# EAGLE board d2102-spinsemi-fx (EAGLE 7.4.1)
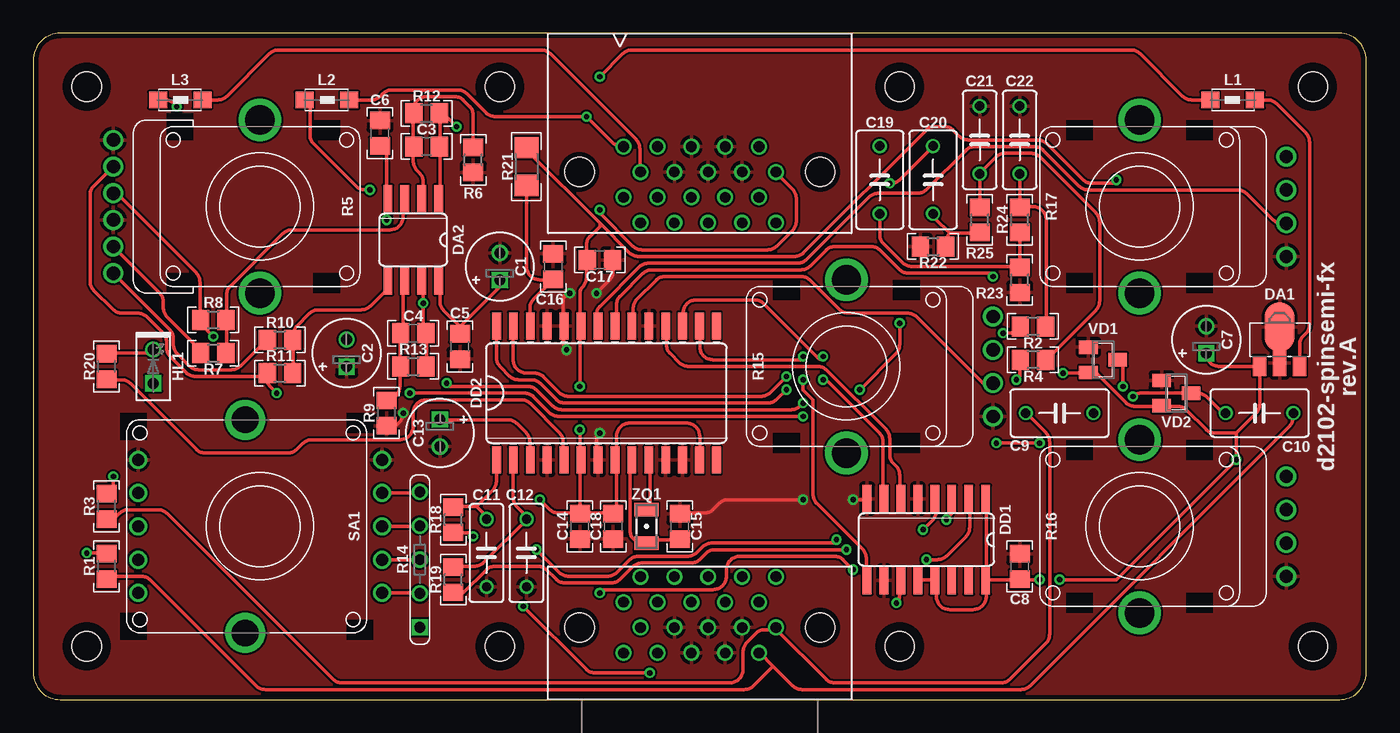
[diagram p0: board, top side]
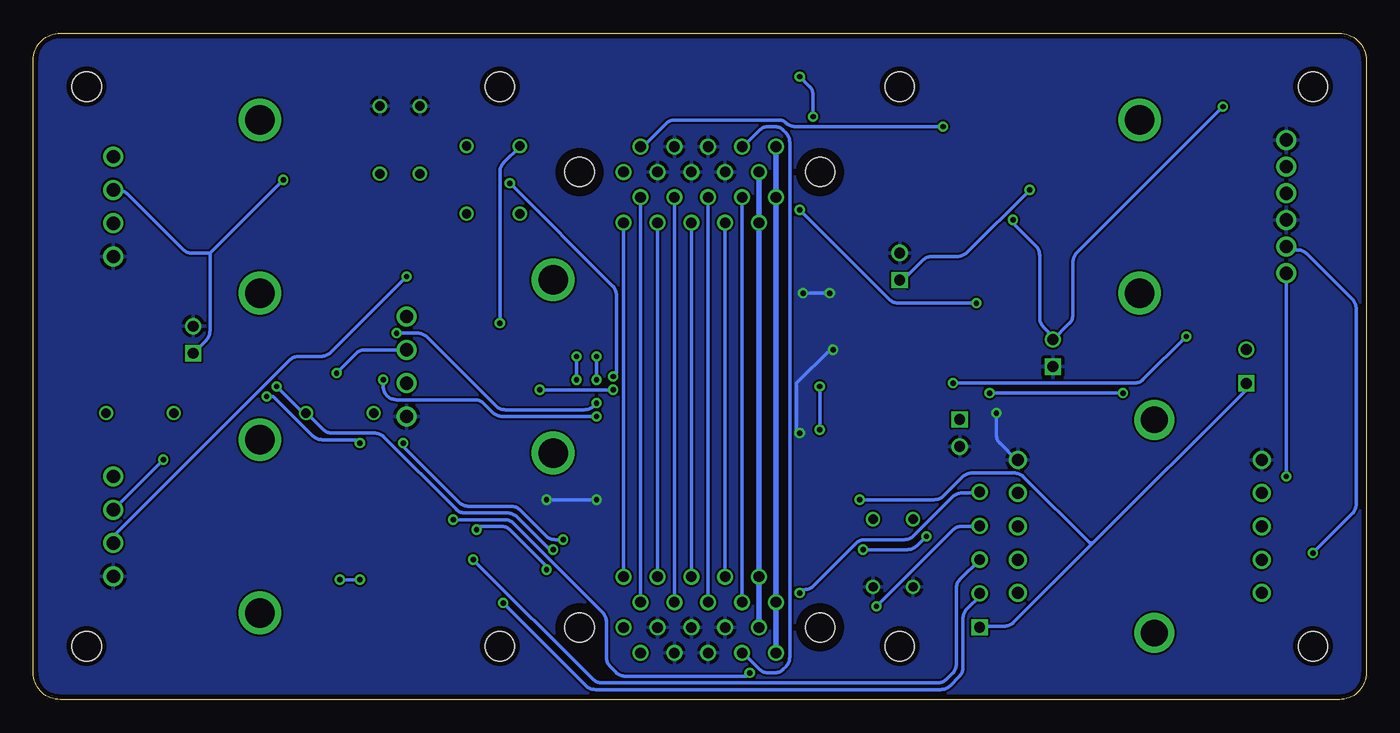
[diagram p1: board, bottom side, seen from below]

Size 100 x 50 mm. Coordinates in mm from the lower left corner, seen from the top.
Outline: 0,48 0,2 arc90 2,0 98,0 arc90 100,2 100,48 arc90 98,50 2,50 arc90 0,48
Copper layers (1*16): Top 0.0356mm / dielectric 1.5011mm / Bottom 0.0356mm
Design rules "sonictrain": minimum track width 6mil, minimum drill 13mil, track to track 6mil, track to pad 6mil, pad to pad 6mil, via to via 6mil, smd to smd 6mil, copper to edge 15mil, drill to drill 6mil, minimum pad ring 7mil, minimum via ring 7mil, stop-mask expansion 3mil, vias tented up to drill 0mil, thermal gap 10mil

## Footprints (pad centres in the part's own frame; a part is rotated, then mirrored left to right if it is on the bottom)
E2-5 = drill 0.813 square: + -1.016,0 | drill 0.813: - 1.016,0
C-0805 = smd 1.3 x 1.5: 1 -0.95,0; 2 0.95,0
C050-035X075 = drill 0.7: 1 -2.54,0; 2 2.54,0
C050-025X075 = drill 0.7: 1 -2.54,0; 2 2.54,0
SOT89 = smd 1 x 1.5: 1 -1.499,-1.981; 3 1.499,-1.981 | smd 1 x 2: 2 0,-1.727 | smd 2.2 x 3.7: 2@1 0,0.94
SO-8 = smd 0.66 x 2.032: 1 -1.905,-3.073; 2 -0.635,-3.073; 3 0.635,-3.073; 4 1.905,-3.073; 5 1.905,3.073; 6 0.635,3.073; 7 -0.635,3.073; 8 -1.905,3.073
SO-16 = smd 0.66 x 2.032: 1 -4.445,-3.073; 2 -3.175,-3.073; 3 -1.905,-3.073; 4 -0.635,-3.073; 5 0.635,-3.073; 6 1.905,-3.073; 7 3.175,-3.073; 8 4.445,-3.073; 9 4.445,3.073; 10 3.175,3.073; 11 1.905,3.073; 12 0.635,3.073; 13 -0.635,3.073; 14 -1.905,3.073; 15 -3.175,3.073; 16 -4.445,3.073
SO28W = smd 0.66 x 2.032: 1 -8.255,-5.029; 2 -6.985,-5.029; 3 -5.715,-5.029; 4 -4.445,-5.029; 5 -3.175,-5.029; 6 -1.905,-5.029; 7 -0.635,-5.029; 8 0.635,-5.029; 9 1.905,-5.029; 10 3.175,-5.029; 11 4.445,-5.029; 12 5.715,-5.029; 13 6.985,-5.029; 14 8.255,-5.029; 15 8.255,5.029; 16 6.985,5.029; 17 5.715,5.029; 18 4.445,5.029; 19 3.175,5.029; 20 1.905,5.029; 21 0.635,5.029; 22 -0.635,5.029; 23 -1.905,5.029; 24 -3.175,5.029; 25 -4.445,5.029; 26 -5.715,5.029; 27 -6.985,5.029; 28 -8.255,5.029
LED2X5 = drill 0.813 square: A -1.27,0 | drill 0.813: K 1.27,0
1206 = smd 1.35 x 1.2: 1 -1.7,0; 2 1.65,0
ST2-BOARD-50 = drill 0.8: A+15 44.285,7.31; A+15' 44.285,37.69; A-15 45.555,9.215; A-15' 45.555,35.785; ACV1 51.905,7.31; ACV1' 51.905,37.69; ACV2 53.175,9.215; ACV2' 53.175,35.785; ALFBK 49.365,7.31; ALFBK' 49.365,37.69; ALMIX 46.825,7.31; ALMIX' 46.825,37.69; ARFBK 50.635,9.215; ARFBK' 50.635,35.785; ARMIX 48.095,9.215; ARMIX' 48.095,35.785; ASMBCLK 55.715,9.215; ASMBCLK' 55.715,35.785; ASMBDAT 54.445,7.31; ASMBDAT' 54.445,37.69; B4 48.095,5.405; B4' 48.095,39.595; B5 49.365,3.5; B5' 49.365,41.5; B6 50.635,5.405; B6' 50.635,39.595; B7 51.905,3.5; B7' 51.905,41.5; B8 53.175,5.405; B8' 53.175,39.595; B+15 44.285,3.5; B+15' 44.285,41.5; B-15 45.555,5.405; B-15' 45.555,39.595; BINL 54.445,3.5; BINR 55.715,5.405; BOUTL' 54.445,41.5; BOUTR' 55.715,39.595; BSENSE 46.825,3.5; BSENSE' 46.825,41.5 | hole 2.2: 4,4; 4,46; 96,4; 96,46; 35,46; 65,46; 65,4; 35,4; 59.025,5.405; 40.975,5.405; 40.975,39.595; 59.025,39.595
R-0805 = smd 1.3 x 1.5: 1 -0.95,0; 2 0.95,0
RV11-DUAL = drill 1: 1 -1,-11; 1' -3,-11; 2 1,-11; 2' -5,-11; 3 3,-11; 3' 5,-11 | drill 2.2: S1 -6.5,0; S2 6.5,0
R-SIL5 = drill 0.813 square: 1 -5.08,0 | drill 0.813: 2 -2.54,0; 3 0,0; 4 2.54,0; 5 5.08,0
RV11-SINGLE = drill 1: 1 -3.75,-11; 2 -1.25,-11; 3 1.25,-11; 4 3.75,-11 | drill 2.2: S1 -6.5,0; S2 6.5,0
R-1206 = smd 1.6 x 1.803: 1 -1.422,0; 2 1.422,0
SRBV = drill 0.9: 1 5,-9.15; 2 2.5,-9.15; 3 0,-9.15; 4 -2.5,-9.15; 5 -5,-9.15; 6 -5,9.15; 7 -2.5,9.15; 8 0,9.15; 9 2.5,9.15; 10 5,9.15 | drill 2: S1 -8,1.1; S2 8,1.1
SOT23 = smd 1 x 1.4: 1 -0.95,-1.1; 2 0.95,-1.1; 3 0,1.1
3215 = smd 1 x 1.8: 1 -1.25,0; 2 1.25,0

## Placement (x,y rotation side)
C1  10U/35V  [E2-5]  35,32.5 90 top
C2  10U/35V  [E2-5]  23.5,26 90 top
C3  22P  [C-0805]  29.5,41.5 0 top
C4  22P  [C-0805]  28.5,27.5 0 top
C5  100N  [C-0805]  32,26.5 90 top
C6  100N  [C-0805]  26,42.5 90 top
C7  10U/35V  [E2-5]  88,27 90 top
C8  100N  [C-0805]  74,10 270 top
C9  330N(FILM)  [C050-035X075]  77,21.5 0 top
C10  330N(FILM)  [C050-035X075]  92,21.5 180 top
C11  2N2(FILM)  [C050-025X075]  34,11 90 top
C12  2N2(FILM)  [C050-025X075]  37,11 90 top
C13  10U/35V  [E2-5]  30.5,20 270 top
C14  100N  [C-0805]  41,13 90 top
C15  15P  [C-0805]  48.5,13 270 top
C16  100N  [C-0805]  39,32.5 270 top
C17  100N  [C-0805]  42.5,33 180 top
C18  100N  [C-0805]  43.5,13 90 top
C19  330N(FILM)  [C050-035X075]  63.5,39 270 top
C20  330N(FILM)  [C050-035X075]  67.5,39 270 top
C21  2N2(FILM)  [C050-025X075]  71,42 270 top
C22  2N2(FILM)  [C050-025X075]  74,42 270 top
DA1  L78L33ACU  [SOT89]  93.5,27 0 top
DA2  NJM2068M  [SO-8]  28.5,34.5 180 top
DD1  74HC148D  [SO-16]  67,12 180 top
DD2  SPN1001  [SO28W]  43,23 0 top
HL1  ORANGE(2MMX5MM)  [LED2X5]  9,25 90 top
L1  BLM31AJ601SN1L  [1206]  90,45 0 top
L2  BLM31AJ601SN1L  [1206]  22,45 180 top
L3  BLM31AJ601SN1L  [1206]  11,45 180 top
O1  [EMPTY]  9,-89 0 top  (outside the outline)
O2  450-AA150(15MM,D,BLACK)  [EMPTY]  -67,-200 0 top  (outside the outline)
O3  450-CP155(15MM,GRAY/WHITE)  [EMPTY]  -72,-210 0 top  (outside the outline)
O4  450-AA150(15MM,D,BLACK)  [EMPTY]  -68,-202 0 top  (outside the outline)
O5  450-CP156(15MM,BLACK/WHITE)  [EMPTY]  -76,-218 0 top  (outside the outline)
O6  450-AA150(15MM,D,BLACK)  [EMPTY]  -69,-204 0 top  (outside the outline)
O7  450-CP153(15MM,BLUE/WHITE)  [EMPTY]  -73,-212 0 top  (outside the outline)
O8  450-AA150(15MM,D,BLACK)  [EMPTY]  -70,-206 0 top  (outside the outline)
O9  450-CP153(15MM,BLUE/WHITE)  [EMPTY]  -74,-214 0 top  (outside the outline)
O10  450-AA150(15MM,D,BLACK)  [EMPTY]  -71,-208 0 top  (outside the outline)
O11  450-CP153(15MM,BLUE/WHITE)  [EMPTY]  -75,-216 0 top  (outside the outline)
PCB1  rev.A  [ST2-BOARD-50]  0,0 0 top
R1  10K  [R-0805]  5.5,10 90 top
R2  10K  [R-0805]  75,28 180 top
R3  10K  [R-0805]  5.5,14.5 90 top
R4  10K  [R-0805]  75,25.5 180 top
R5  2*B20K(CD)  [RV11-DUAL]  17,37 270 top
R6  10K  [R-0805]  33,40.5 90 top
R7  10K  [R-0805]  13.5,26 0 top
R8  10K  [R-0805]  13.5,28.5 0 top
R9  10K  [R-0805]  26.5,21.5 90 top
R10  10K  [R-0805]  18.5,27 0 top
R11  10K  [R-0805]  18.5,24.5 0 top
R12  15K  [R-0805]  29.5,44 0 top
R13  15K  [R-0805]  28.5,25 0 top
R14  10K*4(SIL5)  [R-SIL5]  29,10.5 90 top
R15  B20K  [RV11-SINGLE]  61,25 90 top
R16  B20K  [RV11-SINGLE]  83,13 90 top
R17  B20K  [RV11-SINGLE]  83,37 90 top
R18  1K  [R-0805]  31.5,13.5 90 top
R19  1K  [R-0805]  31.5,9 90 top
R20  100R  [R-0805]  5.5,25 90 top
R21  10R(1206)  [R-1206]  37,40 90 top
R22  100K  [R-0805]  67.5,34 0 top
R23  100K  [R-0805]  74,31.5 90 top
R24  1K  [R-0805]  74,36 90 top
R25  1K  [R-0805]  71,36 90 top
SA1  SRBV151102  [SRBV]  17,13 90 top
U1  FX2-20P-1.27DS  [EMPTY]  12,-89 0 top  (outside the outline)
U2  FX2-20S-1.27DS  [EMPTY]  15,-89 0 top  (outside the outline)
U3  ERM1-5MM  [EMPTY]  -66,-191 0 top  (outside the outline)
VD1  BAV199  [SOT23]  80.25,25.5 270 top
VD2  BAV199  [SOT23]  85.75,23 270 top
ZQ1  32.768KHZ  [3215]  46,13 90 top

## Library data of the parts
C1 C2 C7 C13 = capacitors-electrolytic; MOUSER: 647-USW1V100MDD
C3 C4 = capacitors; MOUSER: 77-VJ0805A220GXACBC
C5 C6 C8 C14 C16-C18 = capacitors; MOUSER: 77-VJ0805V104MXBPBC
C9 C10 C19 C20 = capacitors; MOUSER: 505-MKS2.33/63/10
C11 C12 C21 C22 = capacitors; MOUSER: 80-PHE426DJ4220JR05
C15 = capacitors; MOUSER: 77-VJ0805A150GXAPBC
DA1 = regulators-linear; MOUSER: 511-L78L33ACU
DA2 = ic-jrc; MOUSER: 513-NJM2068M
DD1 = ic-logic
DD2 = ic-spin
HL1 = optoelectronics
L1-L3 = inductors; MOUSER: 81-BLM31AJ601SN1L
O1 = text
O2 O4 O6 O8 O10 = hardware; MOUSER: 450-AA150
O3 = hardware; MOUSER: 450-CP155
O5 = hardware; MOUSER: 450-CP156
O7 O9 O11 = hardware; MOUSER: 450-CP153
PCB1 = module-footprints
R1-R4 R6-R11 = resistors; MOUSER: 660-RK73H2ATTD1002F
R5 = potentiometers; MOUSER: 688-RK12L1230C1M
R12 R13 = resistors; MOUSER: 660-RK73H2ATTD1502F
R14 = resistors; MOUSER: 858-L051S103LF
R15-R17 = potentiometers; MOUSER: 688-RK11K113002F; MOUSER_: 858-P110KH0F25BR20K
R18 R19 R24 R25 = resistors; MOUSER: 660-RK73H2ATTD1001F
R20 = resistors; MOUSER: 660-RK73H2ATTD1000F
R21 = resistors; MOUSER: 660-RK73H2BTTD10R0F
R22 R23 = resistors; MOUSER: 660-RK73H2ATTD1003F
SA1 = switches; MOUSER: 688-SRBV151102
U1 = hardware; MOUSER: 798-FX2-20P-1.27DS71
U2 = hardware; MOUSER: 798-FX2-20S-1.27DS71
U3 = hardware
VD1 VD2 = diodes; MOUSER: 771-BAV199-T/R
ZQ1 = frequency

## Nets
+3.3V: C7.+ C8.2 C14.2 C17.2 C18.2 DA1.1 DD1.1 DD1.12 DD1.13 DD1.16 DD2.6 DD2.8 DD2.13 DD2.23 HL1.A R14.1 R15.3 R16.3 R17.3 R21.2 VD1.2 VD2.2
+15V [power]: C1.+ C5.2 DA2.8 L2.2
-15V [power]: C2.- C6.1 DA2.4 L3.2
GND: C1.- C2.+ C5.1 C6.2 C7.- C8.1 C11.1 C12.1 C13.- C14.1 C15.1 C16.1 C17.1 C18.1 C21.1 C22.1 DA1.2 DA1.2@1 DD1.5 DD1.8 DD1.10 DD2.4 DD2.7 DD2.11 DD2.12 DD2.19 DD2.24 DD2.25 PCB1.B4 PCB1.B4' PCB1.B5 PCB1.B5' PCB1.B6 PCB1.B6' PCB1.B7 PCB1.B7' PCB1.B8 PCB1.B8' R5.2 R5.2' R6.1 R9.1 R15.1 R16.1 R17.1 R22.1 R23.1 SA1.1 SA1.10 VD1.1 VD2.1
IN_LEFT: C10.1 PCB1.BINL R1.1
IN_RIGHT: C9.1 PCB1.BINR R3.1
LMIX: PCB1.ALMIX PCB1.ALMIX'
N$1: PCB1.ALFBK PCB1.ALFBK'
N$2: PCB1.ARFBK PCB1.ARFBK'
N$3: C3.2 DA2.1 PCB1.BOUTL' R12.2
N$4: C4.2 DA2.7 PCB1.BOUTR' R13.2
N$5: DD1.4 R14.5 SA1.2
N$6: DD1.3 R14.4 SA1.3
N$7: R3.2 R5.3' R10.1
N$8: DD1.2 R14.3 SA1.4
N$9: DD1.11 R14.2 SA1.5
N$10: DD1.9 DD2.16
N$11: DD2.10 ZQ1.2
N$12: DD1.7 DD2.17
N$13: DD1.6 DD2.18
N$14: HL1.K R20.2
N$15: DD2.5 R20.1
N$16: PCB1.BSENSE PCB1.BSENSE'
N$17: C12.2 DD2.2 R19.2
N$18: DD2.22 R17.2
N$19: DD2.21 R16.2
N$20: DD2.20 R15.2
N$21: C16.2 DD2.26 R21.1
N$22: C13.+ DD2.3
N$23: C11.2 DD2.1 R18.2
N$24: C10.2 R18.1 VD2.3
N$25: C4.1 DA2.6 R9.2 R13.1
N$26: C9.2 R19.1 VD1.3
N$27: C19.1 DD2.28
N$28: C15.2 DD2.9 ZQ1.1
N$29: C20.1 DD2.27
N$30: R1.2 R5.3 R7.1
N$31: C20.2 R22.2 R25.1
N$32: C19.2 R23.2 R24.1
N$36: L3.1 PCB1.A-15 PCB1.A-15' PCB1.B-15 PCB1.B-15'
N$38: PCB1.ASMBDAT PCB1.ASMBDAT'
N$39: DA2.5 R10.2 R11.2
N$40: R4.2 R5.1' R11.1
N$41: PCB1.ACV1 PCB1.ACV1'
N$42: PCB1.ACV2 PCB1.ACV2'
N$43: PCB1.ASMBCLK PCB1.ASMBCLK'
N$44: DA1.3 L1.2
N$61: DA2.3 R7.2 R8.2
N$64: C3.1 DA2.2 R6.2 R12.1
N$65: R2.2 R5.1 R8.1
OUT_LEFT: C22.2 R2.1 R24.2
OUT_RIGHT: C21.2 R4.1 R25.2
P+15V: L1.1 L2.1 PCB1.A+15 PCB1.A+15' PCB1.B+15 PCB1.B+15'
RMIX: PCB1.ARMIX PCB1.ARMIX'

## Tracks (layer width: path | path; a pad name or v marks a point on that pad's centre or on a via)
+3.3V  (via drill 0.4)
  Top 0.254: 40.75,14 41,14.25 41,17.75 DD2.6 41,18 v41,20.25 | 40.75,14 41,13.75 C14.2 | C14.2 41,14 43.5,14 C18.2 43.5,13.75 43.75,14 43.75,17.75 DD2.8 43.75,18 43.75,19.75 arc-90 44.75,20.75 49,20.75 arc-90 50,19.75 50,18 DD2.13 | DD1.12 66.5,9 67.5,9 DD1.13 67.75,8.75 67.75,7.75 arc90 68.75,6.75 70.5,6.75 arc90 71.5,7.75 71.5,8.75 DD1.16 71.5,9 | 40.75,14 39.41,14 arc-45 38.71,14.29 v38,15 | 40.75,14 C14.2 | v77.25,24.5 79,24.5 VD1.2 79.25,24.5 79.75,24.5 81.96,22.29 arc45 82.66,22 84.5,22 VD2.2 84.75,22 85.84,22 arc-45 86.54,21.71 87.96,20.29 arc45 88.66,20 90.25,20 | v41,23.5 41,28 DD2.23 41,28.25 41,30.46 arc-45 41.21,30.96 arc45 41.5,31.66 41.5,33 | v81.25,39 81,38.75 79.41,38.75 arc-45 78.71,39.04 76.04,41.71 arc45 75.34,42 70.16,42 arc-45 69.46,42.29 69.04,42.71 arc45 68.34,43 67.66,43 arc45 66.96,42.71 57.79,33.54 arc-45 57.09,33.25 45.41,33.25 arc-45 44.71,33.54 42.5,35.75 | 42.5,35.75 37,41.25 R21.2 | 41.5,33 41.5,34.09 arc-45 41.79,34.79 42.5,35.5 42.5,35.75 | 41.5,33 C17.2 | C7.+ arc90 88.98,25 91.75,25 92,24.75 | 92,24.75 92.25,25 DA1.1 92,24.75 | 90.25,20 91.71,21.46 arc45 92,22.16 92,24.75 | 90.25,20 v90.25,18 81.25,9 v77,9 | 74,9 71.5,9 | DD1.1 71.5,15 71.5,9 | 74,9 v75.5,9 | 74,9 C8.2
  Bottom 0.254: HL1.A 9,23.25 20.5,11.75 | 20.5,11.75 26.46,5.79 arc45 27.16,5.5 29,5.5 R14.1 | v38,15 32.41,15 arc-45 31.71,15.29 30.29,16.71 arc45 29.59,17 26.41,17 arc45 25.71,16.71 20.75,11.75 20.5,11.75 | R15.3 75.09,26.25 arc-45 75.79,25.96 v77.25,24.5 | v41,20.25 v41,23.5 | v81.25,39 86.75,33.5 | 86.75,33.5 86.75,27.66 arc45 87.04,26.96 88,26 C7.+ | R17.3 93.66,38.25 arc45 92.96,37.96 88.79,33.79 arc-45 88.09,33.5 86.75,33.5 | R16.3 v90.25,18 | v75.5,9 v77,9
+15V  (via drill 0.4)
  Top 0.254: 32,28 32.25,27.75 32.25,27.5 32,27.25 C5.2 32,28 | 32,28 30.79,29.21 arc-45 30.5,29.91 30.5,31.25 DA2.8 30.5,31.5 | 32,28 35,31 C1.+ | v25.25,38.25 24.91,38.25 arc-45 24.21,38.54 21.04,41.71 arc-45 20.75,42.41 20.75,45 L2.2
  Bottom 0.254: C1.+ 35,31.25 33.29,32.96 arc45 32.59,33.25 30.66,33.25 arc-45 29.96,33.54 v25.25,38.25
-15V  (via drill 0.4)
  Top 0.254: C6.1 26,41.75 26.5,41.25 26.5,37.75 DA2.4 26.5,37.5 v26.5,36 | L3.2 9.84,45 arc-45 10.54,44.71 v10.75,44.5
  Bottom 0.254: v26.5,36 26.5,35.75 24.79,34.04 arc45 24.5,33.34 24.5,28.66 arc-45 24.21,27.96 23.5,27.25 C2.- 23.5,27 22.29,28.21 arc-45 22,28.91 22,32.84 arc45 21.71,33.54 v10.75,44.5
GND  (via drill 0.4)
  Top 0.254: v42.5,20 42.25,19.75 42.25,18 DD2.7 | v40,26.25 arc-45 39.75,26.85 39.75,28 DD2.24 39.75,28.25 39.75,30 arc-90 v40.25,30.5 | v57.75,15 52.16,15 arc45 51.46,14.71 51.04,14.29 arc-45 50.34,14 48.5,14 C15.1 | v61.5,15 62.25,15 62.5,14.75 62.75,15 DD1.8 | v27.75,21.5 arc-90 26.75,20.5 26.5,20.5 R9.1 | v42.25,30.5 43.21,31.46 arc45 43.5,32.16 43.5,33 C17.1
  Bottom 0.254: v42.5,20 42.75,20.25 42.75,23.75 40.25,26.25 v40,26.25 | v61.5,15 v57.75,15 | v27.75,21.5 27.75,19.91 arc-45 27.46,19.21 26.25,18 SA1.1 | v42.25,30.5 v40.25,30.5
  pour Top: 2,50 98,50 arc-90 100,48 100,2 arc-90 98,0 2,0 arc-90 0,2 0,48 arc-90
  pour Bottom: 2,50 98,50 arc-90 100,48 100,2 arc-90 98,0 2,0 arc-90 0,2 0,48 arc-90
IN_LEFT
  Top 0.254: 55.5,2.5 56.96,1.04 arc45 57.66,0.75 74.09,0.75 arc45 74.79,1.04 94.21,20.46 arc45 94.5,21.16 94.5,21.5 C10.1 | 55.5,2.5 54.5,3.5 PCB1.BINL | 55.5,2.5 54.04,1.04 arc-45 53.34,0.75 17.41,0.75 arc-45 16.71,1.04 8.79,8.96 arc45 8.09,9.25 5.25,9.25 R1.1
IN_RIGHT
  Top 0.254: C9.1 74.5,21.5 75.96,20.04 arc-45 76.25,19.34 76.25,4.91 arc-45 75.96,4.21 73.29,1.54 arc-45 72.59,1.25 60.16,1.25 arc-45 59.46,1.54 55.75,5.25 PCB1.BINR 55.5,5.25 54.91,5.25 arc45 54.21,4.96 53.54,4.29 arc45 53.25,3.59 53.25,2.25 arc-90 52.25,1.25 23.16,1.25 arc-45 22.46,1.54 10.04,13.96 arc45 9.34,14.25 7.16,14.25 arc45 6.46,13.96 6,13.5 R3.1
LMIX
  Bottom 0.254: PCB1.ALMIX PCB1.ALMIX'
N$1
  Bottom 0.254: PCB1.ALFBK' PCB1.ALFBK
N$2
  Bottom 0.254: PCB1.ARFBK PCB1.ARFBK'
N$3  (via drill 0.4)
  Top 0.254: DA2.1 30.5,37.75 30.5,41.5 | 30.5,41.5 30.5,44 R12.2 30.25,44 30.5,44.25 v31.75,43 | 30.5,41.5 C3.2
  Bottom 0.254: v31.75,43 42.84,43 arc45 43.54,43.29 arc-45 44.04,43.5 51.84,43.5 arc-45 52.54,43.21 54.25,41.5 PCB1.BOUTL'
N$4  (via drill 0.4)
  Top 0.254: 29.5,27.5 29.5,25 R13.2 | 29.5,27.5 29.5,28 29.25,28.25 v29.25,29.75 29.25,31.25 DA2.7 | 29.5,27.5 C4.2 | v42.5,36.75 42.5,36.5 44.96,34.04 arc45 45.66,33.75 55.09,33.75 arc45 55.79,34.04 56.96,35.21 arc45 57.25,35.91 57.25,37.59 arc45 56.96,38.29 55.75,39.5 PCB1.BOUTR'
  Bottom 0.254: v29.25,29.75 35.09,29.75 arc45 35.79,30.04 v42.5,36.75
N$5  (via drill 0.4)
  Top 0.254: R14.5 29,15.5 SA1.2 | v42.5,8 42.75,8.25 51,8.25 arc90 52,9.25 52,9.75 arc-90 53,10.75 60.09,10.75 arc-45 60.79,10.46 v61.5,9.75 | v66.75,12.75 67.46,13.46 arc45 67.75,14.16 67.75,15 DD1.4
  Bottom 0.254: R14.5 29,15.5 30.34,15.5 arc-45 31.04,15.21 33.96,12.29 arc45 34.66,12 37.59,12 arc-45 38.29,11.71 41.46,8.54 arc45 42.16,8.25 42.25,8.25 v42.5,8 | v61.5,9.75 61.5,10 64.21,12.71 arc-45 64.91,13 66.5,13 v66.75,12.75
N$6  (via drill 0.4)
  Top 0.254: R14.4 29,13 SA1.3 | v36.75,7 41.46,2.29 arc45 42.16,2 v46.25,2 | v68.5,13.5 68.71,13.71 arc45 69,14.41 69,15 DD1.3
  Bottom 0.254: v68.5,13.5 64.66,13.5 arc45 63.96,13.21 57.29,6.54 arc45 57,5.84 57,3.16 arc-45 56.71,2.46 56.29,2.04 arc-45 55.59,1.75 46.5,1.75 v46.25,2 | v36.75,7 31.04,12.71 arc45 30.34,13 29,13 R14.4
N$7  (via drill 0.4)
  Top 0.254: R5.3' 10.21,27.79 arc-45 10.5,27.09 10.5,26.66 arc45 10.79,25.96 11.71,25.04 arc45 12.41,24.75 14.84,24.75 arc45 15.54,25.04 17.75,27.25 17.75,27 R10.1 | v6,16.75 6,15.75 5.5,15.25 R3.2
  Bottom 0.254: v6,16.75 R5.3'
N$8  (via drill 0.4)
  Top 0.254: R14.3 SA1.4 | v67,10.5 67.84,10.5 arc45 68.54,10.79 69.96,12.21 arc45 70.25,12.91 70.25,15 DD1.2
  Bottom 0.254: R14.3 30.46,9.04 arc-45 30.75,8.34 30.75,2.66 arc45 31.04,1.96 31.46,1.54 arc45 32.16,1.25 57.34,1.25 arc45 58.04,1.54 v67,10.5
N$9  (via drill 0.4)
  Top 0.254: SA1.5 29,8 R14.2 | v64.75,7.25 arc45 65,7.85 65,8.75 DD1.11
  Bottom 0.254: R14.2 29,7.75 29.96,6.79 arc-45 30.25,6.09 30.25,2.41 arc45 30.54,1.71 31.21,1.04 arc45 31.91,0.75 57.84,0.75 arc45 58.54,1.04 v64.75,7.25
N$10  (via drill 0.4)
  Top 0.254: DD2.16 50,28 50,26.5 arc90 51,25.5 57.75,25.5 v57.75,25.75 | v57.75,24 57.75,23.25 58.5,22.5 58.5,15.41 arc45 58.79,14.71 62.21,11.29 arc-45 62.5,10.59 62.5,9 DD1.9
  Bottom 0.254: v57.75,24 v57.75,25.75
N$11
  Top 0.254: ZQ1.2 46.25,14.25 46.25,17.75 DD2.10
N$12  (via drill 0.4)
  Top 0.254: DD2.17 48.75,28.25 48.75,29 arc-90 49.75,30 54.09,30 arc-45 54.79,29.71 58.82,25.68 arc45 59.25,25.5 v59.25,25.75 | v59.25,24 59.5,24 63.46,20.04 arc-45 63.75,19.34 63.75,15.25 DD1.7
  Bottom 0.254: v59.25,24 v59.25,25.75
N$13
  Top 0.254: DD1.6 65,15.25 65,16.84 arc45 64.71,17.54 64.54,17.71 arc-45 64.25,18.41 64.25,19.59 arc45 63.96,20.29 59.54,24.71 arc45 58.84,25 49.16,25 arc-45 48.46,25.29 47.79,25.96 arc-45 47.5,26.66 47.5,28 DD2.18
N$14
  Top 0.254: R20.2 5.5,26 8.75,26 9,26.25 HL1.K
N$15
  Top 0.254: DD2.5 39.75,18 39.75,19.34 arc45 39.46,20.04 37.29,22.21 arc45 36.59,22.5 29.5,22.5 arc90 28.5,21.5 28.5,20.5 arc-90 27.5,19.5 20.91,19.5 arc45 20.21,19.21 19.79,18.79 arc-45 19.09,18.5 12.91,18.5 arc-45 12.21,18.79 7.29,23.71 arc45 6.59,24 5.5,24 R20.1
N$16
  Bottom 0.254: PCB1.BSENSE 46.75,3.5 45.54,2.29 arc-45 44.84,2 44.41,2 arc-45 43.71,2.29 43.54,2.46 arc-45 43.25,3.16 43.25,41.84 arc-45 43.54,42.54 43.71,42.71 arc-45 44.41,43 44.84,43 arc-45 45.54,42.71 46.75,41.5 PCB1.BSENSE'
N$17
  Top 0.254: R19.2 31.5,10 33.09,10 arc45 33.79,10.29 37,13.5 C12.2 37,13.75 36.29,14.46 arc-45 36,15.16 36,17.75 DD2.2
N$18
  Top 0.254: R17.2 93.66,35.75 arc-45 92.96,36.04 91.04,37.96 arc45 90.34,38.25 79.16,38.25 arc-45 78.46,38.54 75.79,41.21 arc45 75.09,41.5 70.66,41.5 arc45 69.96,41.21 67.04,38.29 arc-45 66.34,38 63.41,38 arc45 62.71,37.71 58.04,33.04 arc-45 57.34,32.75 46.16,32.75 arc45 45.46,32.46 42.54,29.54 arc45 42.25,28.84 42.25,28.25 DD2.22
N$19  (via drill 0.4)
  Top 0.254: v72,31.75 71.75,32 65.66,32 arc-45 64.96,32.29 63.54,33.71 arc45 62.84,34 60.16,34 arc45 59.46,33.71 58.29,32.54 arc-45 57.59,32.25 46.41,32.25 arc45 45.71,31.96 44.04,30.29 arc45 43.75,29.59 43.75,28.25 DD2.21
  Bottom 0.254: R16.2 94,11.84 arc45 93.71,12.54 80.79,25.46 arc45 80.09,25.75 78.41,25.75 arc-45 77.71,26.04 v72,31.75
N$20
  Top 0.254: R15.2 71.25,23.75 66.29,28.71 arc45 65.59,29 61.16,29 arc-45 60.46,29.29 58.29,31.46 arc45 57.59,31.75 47.41,31.75 arc45 46.71,31.46 45.29,30.04 arc45 45,29.34 45,28.25 DD2.20
N$21
  Top 0.254: 39,31.5 37.54,30.04 arc45 37.25,29.34 37.25,28.25 DD2.26 | R21.1 37,38.75 36.75,38.5 37,38.25 37,32.5 arc90 38,31.5 39,31.5 | 39,31.5 C16.2
N$22
  Top 0.254: C13.+ 30.5,21 35.59,21 arc-45 36.29,20.71 36.96,20.04 arc-45 37.25,19.34 37.25,18 DD2.3
N$23
  Top 0.254: 33.25,14.5 31.5,14.5 R18.2 | 33.25,14.5 33.85,13.9 arc-45 C11.2 | 33.25,14.5 34.46,15.71 arc45 34.75,16.41 34.75,17.75 DD2.1
N$24  (via drill 0.4)
  Top 0.254: C10.2 89.25,21.5 88.04,22.71 arc45 87.34,23 VD2.3 83.1,23 arc45 v82.5,22.75 | v33,12.25 32.75,12.5 31.5,12.5 R18.1 | v37.75,11.25 39.46,9.54 arc45 40.16,9.25 43.09,9.25 arc45 43.79,9.54 44.71,10.46 arc-45 45.41,10.75 49.09,10.75 arc45 49.79,11.04 50.21,11.46 arc-45 50.91,11.75 60,11.75 v60.25,12 | v75.5,19.25 v72.25,19.25
  Bottom 0.254: v37.75,11.25 34.41,11.25 arc-45 33.71,11.54 v33,12.25 | v60.25,12 60.84,12 arc45 61.54,12.29 63.46,14.21 arc-45 64.16,14.5 67.34,14.5 arc45 68.04,14.79 72.25,19 v72.25,19.25 | v75.5,19.25 75.75,19.5 78.34,19.5 arc45 79.04,19.79 82,22.75 v82.5,22.75
N$25
  Top 0.254: 27.5,27.5 27.5,25 | 27.5,27.5 27.5,28 27.75,28.25 27.75,31.25 DA2.6 | 27.5,27.5 C4.1 | 27.5,25 27.5,23.5 arc-90 26.5,22.5 R9.2 | 27.5,25 R13.1
N$26  (via drill 0.4)
  Top 0.254: v81.75,23.5 81.75,25.5 VD1.3 | v61,11.25 51.16,11.25 arc45 50.46,10.96 50.04,10.54 arc-45 49.34,10.25 45.66,10.25 arc45 44.96,9.96 44.04,9.04 arc-45 43.34,8.75 39.91,8.75 arc-45 39.21,9.04 38.54,9.71 arc45 37.84,10 34.66,10 arc45 33.96,9.71 32.25,8 31.5,8 R19.1
  Bottom 0.254: v81.75,23.5 79.9,21.65 arc-45 C9.2 79.5,21.5 78.29,20.29 arc-45 77.59,20 74.41,20 arc45 73.71,19.71 68.29,14.29 arc-45 67.59,14 64.41,14 arc45 63.71,13.71 61.25,11.25 v61,11.25
N$27  (via drill 0.4)
  Top 0.254: v65,28.25 65,26.66 arc-45 64.71,25.96 v62,23.25 | v56.5,23.25 55.79,22.54 arc-45 55.09,22.25 39.91,22.25 arc-45 39.21,22.54 38.04,23.71 arc45 37.34,24 36.41,24 arc-45 35.71,24.29 35.04,24.96 arc-45 34.75,25.66 34.75,28 DD2.28
  Bottom 0.254: v56.5,23.25 v62,23.25 | v65,28.25 65,39.59 arc45 64.71,40.29 63.5,41.5 C19.1
N$28
  Top 0.254: DD2.9 45,17.75 45,17.5 44.75,17.25 44.75,12.75 arc90 45.75,11.75 ZQ1.1 46.5,11.75 46.75,12 48.5,12 C15.2
N$29  (via drill 0.4)
  Top 0.254: v56.5,24.25 55.29,23.04 arc-45 54.59,22.75 40.16,22.75 arc-45 39.46,23.04 38.29,24.21 arc45 37.59,24.5 37,24.5 arc-90 36,25.5 36,28 DD2.27 | v64.25,38.75 64.34,38.75 arc45 65.04,39.04 67.5,41.5 C20.1
  Bottom 0.254: v56.5,24.25 56.25,24.5 56.25,30.34 arc-45 56.54,31.04 v64.25,38.75
N$30  (via drill 0.4)
  Top 0.254: R5.3 9.46,30.54 arc-45 9.75,29.84 9.75,29.41 arc45 10.04,28.71 12.5,26.25 12.5,26 R7.1 | v4,11 5.5,11 R1.2
  Bottom 0.254: v4,11 1.04,13.96 arc-45 0.75,14.66 0.75,29.34 arc-45 1.04,30.04 4.46,33.46 arc-45 5.16,33.75 5.75,33.75 R5.3
N$31
  Top 0.254: R25.1 71,35 68.75,35 | 68.75,35 arc45 68.5,34.4 68.5,34 R22.2 | 68.75,35 67.65,36.1 arc-45 C20.2
N$32
  Top 0.254: R24.1 74,35.25 73.75,35 74,34.75 74,32.75 73.75,32.5 | 73.75,32.5 74,32.25 R23.2 73.75,32.5 | 73.75,32.5 65.91,32.5 arc-45 65.21,32.79 63.79,34.21 arc-45 63.5,34.91 C19.2
N$36
  Top 0.254: PCB1.B-15' 45.5,39.75 45.5,41.34 arc45 45.21,42.04 38.79,48.46 arc45 38.09,48.75 18.41,48.75 arc45 17.71,48.46 14.54,45.29 arc-45 13.84,45 L3.1
  Bottom 0.406: PCB1.B-15' PCB1.A-15' PCB1.A-15 PCB1.B-15
N$38
  Bottom 0.254: PCB1.ASMBDAT PCB1.ASMBDAT'
N$39
  Top 0.254: 19.5,27 19.5,24.5 R11.2 | 19.5,27 19.5,27.34 arc-45 19.79,28.04 20.71,28.96 arc-45 21.41,29.25 24.59,29.25 arc45 25.29,29.54 26.5,30.75 26.5,31.25 DA2.5 | 19.5,27 R10.2
N$40  (via drill 0.4)
  Top 0.254: 17.5,24.25 12.16,24.25 arc-45 11.46,24.54 10.29,25.71 arc-45 10,26.41 10,26.84 arc45 9.71,27.54 8.54,28.71 arc45 7.84,29 6.66,29 arc-45 5.96,29.29 4.54,30.71 arc-45 4.25,31.41 4.25,37.84 arc-45 4.54,38.54 R5.1' | 17.5,24.25 17.75,24.5 R11.1 17.5,24.25 | v73.75,24 74,24.25 74,25.5 R4.2 | v57.75,21.25 39.41,21.25 arc-45 38.71,21.54 37.54,22.71 arc45 36.84,23 v28.25,23 | 17.5,24.25 17.5,24.16 arc45 17.79,23.46 v18.25,23
  Bottom 0.254: v73.75,24 73.75,23.5 arc-90 72.75,22.5 66.91,22.5 arc45 66.21,22.21 65.54,21.54 arc-45 64.84,21.25 v57.75,21.25 | v18.25,23 v28.25,23
N$41
  Bottom 0.254: PCB1.ACV1 PCB1.ACV1'
N$42
  Bottom 0.254: PCB1.ACV2' PCB1.ACV2
N$43
  Bottom 0.254: PCB1.ASMBCLK' PCB1.ASMBCLK
N$44
  Top 0.254: L1.2 92.59,45 arc-45 93.29,44.71 95.46,42.54 arc-45 95.75,41.84 95.75,28.16 arc-45 95.46,27.46 95.29,27.29 arc45 95,26.59 95,25.25 DA1.3
N$61
  Top 0.254: 14.5,28.5 14.5,26 R7.2 | DA2.3 27.75,37.5 27.75,36.25 arc-90 26.75,35.25 19.41,35.25 arc45 18.71,34.96 14.79,31.04 arc45 14.5,30.34 14.5,28.5 | 14.5,28.5 R8.2
N$64
  Top 0.254: 28.5,41.5 28.5,44 | 28.5,41.5 28.5,40.41 arc45 28.79,39.71 28.96,39.54 arc-45 29.25,38.84 29.25,37.75 DA2.2 | 28.5,41.5 C3.1 | 28.5,44 28.5,44.25 arc-90 29.5,45.25 31.59,45.25 arc-45 32.29,44.96 32.71,44.54 arc-45 33,43.84 33,41.75 32.75,41.5 33,41.25 R6.2 | 28.5,44 R12.1
N$65  (via drill 0.4)
  Top 0.254: R5.1 arc-45 6.43,37.82 12.21,32.04 arc-45 12.5,31.34 12.5,28.5 | v72.75,27.5 73.75,27.5 74.25,28 R2.2 | v57.75,22.25 57.54,22.04 arc-45 56.84,21.75 39.66,21.75 arc-45 38.96,22.04 37.79,23.21 arc45 37.09,23.5 31.25,23.5 v31,23.75 | v13.5,27.25 12.5,28.25 12.5,28.5 | 12.5,28.5 R8.1
  Bottom 0.254: v72.75,27.5 71.16,27.5 arc45 70.46,27.21 65.29,22.04 arc-45 64.59,21.75 58.66,21.75 arc-45 57.96,22.04 v57.75,22.25 | v13.5,27.25 16.71,24.04 arc45 17.41,23.75 v31,23.75
OUT_LEFT
  Top 0.254: C22.2 74,37.25 73.75,37 74,36.75 R24.2 74,37 75,37 arc-90 76,36 76,28 R2.1
OUT_RIGHT
  Top 0.254: R25.2 71,36.75 70.75,37 71,37.25 C21.2 71,39.5 72.21,40.71 arc-45 72.91,41 74.84,41 arc-45 75.54,40.71 79.71,36.54 arc-45 80,35.84 80,29.91 arc-45 79.71,29.21 76,25.5 R4.1
P+15V  (via drill 0.4)
  Top 0.254: L2.1 25.34,45 arc45 26.04,45.29 26.21,45.46 arc-45 26.91,45.75 31.84,45.75 arc-45 32.54,45.46 33.96,44.04 arc45 34.66,43.75 v41.5,43.75 43.46,41.79 arc45 44.16,41.5 PCB1.B+15' | v42.5,46.75 44.21,48.46 arc-45 44.91,48.75 82.34,48.75 arc-45 83.04,48.46 86.21,45.29 arc45 86.91,45 L1.1
  Bottom 0.254: v42.5,46.75 41.79,46.04 arc45 41.5,45.34 v41.5,43.75
  Bottom 0.406: PCB1.B+15 PCB1.A+15 PCB1.A+15' PCB1.B+15'
RMIX
  Bottom 0.254: PCB1.ARMIX' PCB1.ARMIX